# Allegro board ENIGHTER_V11.brd
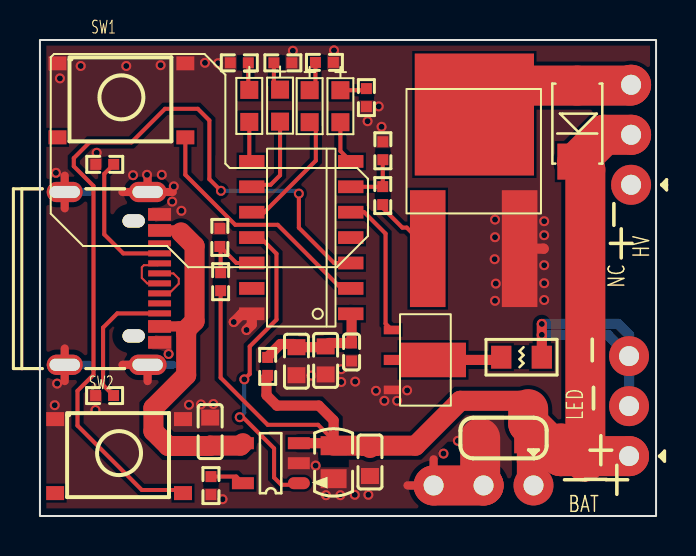
[diagram p0: board, top side]
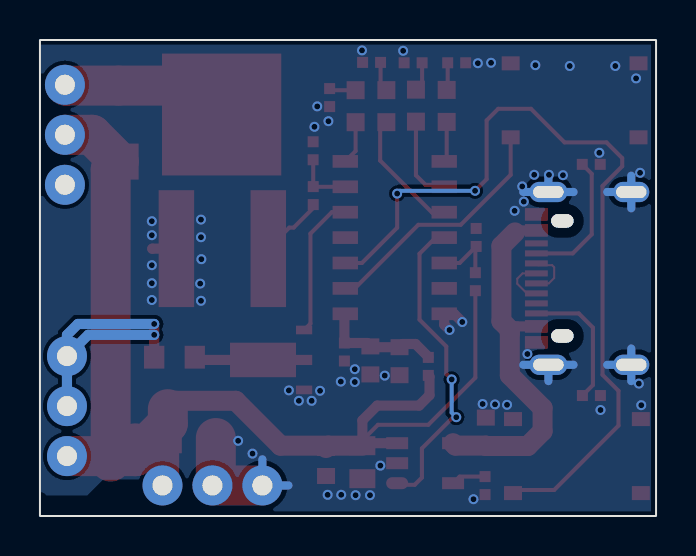
[diagram p1: board, bottom side, seen from below]

Outline 30.84 x 23.8 mm; copper layers: TOP, GND1, POWER1, POWER2, GND2, SIGNAL, GND3, BOTTOM. Coordinates in mm from the lower left corner of the outline.
Outline path: rectangle 0,0 30.84,23.8

## Placement (name value [footprint] x y rotation side)
C2  22uF  [C0805]  14.7 2.69 270 top
C3  4.7uF  [C0603]  14.3 7.78 270 top
C4  0.1uF  [C0402]  15.6 8.2 270 top
C5  4.7uF  [C0603]  12.84 7.74 270 top
C6  4.7uF  [C0603]  16.52 2.7 270 top
C7  4.7uF  [C0603]  8.52 4.22 90 top
C8  47uF  [C1206]  23.21 3.9 180 top
D1  ss34  [DO_214AC]  26.9 19.62 90 top
D2  VLMB1300  [LED0603]  15.04 20.49 270 top
D3  VLMB1300  [LED0603]  10.48 20.5 270 top
D4  VLMB1300  [LED0603]  12.02 20.52 270 top
D5  VLMB1300  [LED0603]  13.5 20.49 270 top
J90047  USB_TYPEC_115H0  [TYPEC-16PIN-GY]  3.31 11.88 270 top
J90048  3pin  [HV_MODEUL]  29.49 2.99 90 top
J90049  3pin  [HV_MODEUL]  24.71 1.53 180 top
L1  -  [HV_MODEUL]  29.59 16.56 90 top
Q7  TMN6010D  [SOT89_2D3]  17.62 6.3 0 top
Q8  TMN6010D  [TO252-3L]  19.41 13.4 0 top
R3  1k  [R0402]  14.24 22.68 0 top
R4  1k  [R0402]  12.16 22.66 0 top
R5  1k  [R0402]  9.98 22.66 180 top
R6  1k  [R0402]  16.34 20.92 270 top
R7  10k  [R0402]  9.04 11.72 90 top
R8  10k  [R0402]  9.01 13.93 90 top
R9  0R  [R0402]  11.4 7.48 90 top
R11  470R  [R0402]  17.16 16.02 270 top
R18  2k  [R0402]  8.56 1.52 270 top
R20  100R  [R0805]  24.11 7.94 0 top
R23  5.1k  [R0402]  3.24 17.58 0 top
R24  5.1k  [R0402]  3.23 6.02 0 top
R25  4.7k  [R0402]  17.16 18.26 90 top
SW1  TACT_SPST  [KEY_4]  0.88 22.63 0 top
SW2  TACT_SPST  [KEY_4]  0.76 4.84 0 top
U1  PMS120-S14A  [SOP14_3D8]  13.08 13.92 180 top
U3  TP4055  [SOT23-5]  11.56 2.64 180 top

## Library data of the parts
C2-C8 = CAP_NP
D1 = DIODE SCHOTTKY_0
D2-D5 = DIODE-LED_0
J90047 = USB31_TYPE_C_0
J90048 J90049 = 3pin
L1 = HV_MODEUL
Q7 Q8 = MOSFET-N-ENHANCE
R3-R9 R11 R18 R20 R23-R25 = RESISTOR
SW1 SW2 = SWITCH_PRESS_4P
U1 = PMS120-S14A: Tolerance: ***; User Part Number: ***
U3 = TP4055

## Footprints (pads in the part's own frame, mm; a bottom-side part is the same pattern mirrored in y, then rotated)
C0402
  rect 0.55x0.55 smd: 1(-0.45,0) 2(0.45,0)
C0603
  rect 0.8x0.9 smd: 1(-0.7,0) 2(0.7,0)
C0805
  rect 0.95x1.3 smd: 1(-0.825,0) 2(0.825,0)
C1206
  rect 1.27x1.524 smd: 1(-1.168,0) 2(1.168,0)
DO_214AC
  rect 1.8x2 smd: 1(1.9,0) 2(-1.9,0)
HV_MODEUL
  round 2 hole 1: 1(0,0) 2(2.5,0) 3(5,0)
KEY_4
  rect 0.9x0.7 smd: 1(0,0) 2(6.4,0) 3(0,-3.7) 4(6.4,-3.7)
LED0603
  rect 0.9x0.9 smd: 1(-0.8,0) 2(0.8,0)
R0402
  rect 0.55x0.55 smd: 1(-0.45,0) 2(0.45,0)
R0805
  rect 1.016x1.143 smd: 1(-1.016,0) 2(1.016,0)
SOP14_3D8
  rect 1.27x0.635 smd: 1(-2.477,3.81) 2(-2.477,2.54) 3(-2.477,1.27) 4(-2.477,0) 5(-2.477,-1.27) 6(-2.477,-2.54) 7(-2.477,-3.81) 8(2.477,-3.81) 9(2.477,-2.54) 10(2.477,-1.27) 11(2.477,0) 12(2.477,1.27) 13(2.477,2.54) 14(2.477,3.81)
SOT23-5
  oval 1.1x0.6 smd: 1(-1.4,1)
  rect 1.1x0.6 smd: 2(-1.4,0) 3(-1.4,-1) 4(1.4,-1) 5(1.4,1)
SOT89_2D3
  rect 0.813x0.432 smd: 1(0,2.997) 2(0,0)
  custom 4.115x1.727 smd: 3(1.651,1.499)
TO252-3L
  rect 1.778x5.842 smd: 1(-0.004,-0.034) 2(4.596,-0.034)
  rect 5.969x6.096 smd: 3(2.332,6.673)
TYPEC-16PIN-GY
  oval 0.66x1.118 hole 0.66x1.118 unplated: (-2.875,1.375) (2.875,1.375)
  rect 0.61x1.143 smd: A1(-3.2,2.675) A4(-2.4,2.675) A9(2.4,2.675) A12(3.2,2.675) B1(3.2,2.675) B4(2.4,2.675) B9(-2.4,2.675) B12(-3.2,2.675)
  rect 0.305x1.143 smd: A5(-1.25,2.675) A6(-0.25,2.675) A7(0.25,2.675) A8(-1.75,2.675) B5(1.75,2.675) B6(0.75,2.675) B7(-0.75,2.675) B8(1.25,2.675)
  oval 1.016x1.803 hole 0.61x1.524: E1(-4.32,-2.075) E2(4.32,-2.075)
  oval 1.016x1.905 hole 0.61x1.524: E3(-4.32,2.075) E4(4.32,2.075)

## Nets
VBAT: R7.2 R8.1 U1.12(PA4/AD9)
VCC3V3: C3.1 C4.1 C5.1 R9.2 U1.1(VDD)
0: C2.2 C3.2 C4.2 C5.2 C6.2 C7.2 C8.2 J90047.A1(GND1) J90047.A12(GND2) J90047.B1(GND3) J90047.B12(GND4) J90047.E1(GND_E1) J90047.E2(GND_E2) J90047.E3(GND_E3) J90047.E4(GND_E4) J90049.2 J90049.3 Q7.2(SOURCE) Q8.2(SOURCE) R3.2 R4.2 R5.2 R6.2 R8.2 R18.2 R23.1 R24.1 R25.2 SW1.1 SW1.2 SW2.1 SW2.2 U1.14(GND) U3.2(GND)
BAT: C2.1 C6.1 C8.1 D1.2(CATHODE) J90048.1 J90049.1 L1.2 R7.1 R9.1 U3.3(BAT)
CHAR_DET: U1.11(PA3/AD8/TM2PWM) U3.1(CHRG)
USB5V: C7.1 J90047.A4(VBUS_1) J90047.A9(VBUS_2) J90047.B4(VBUS_3) J90047.B9(VBUS_4) U3.4(VCC)
N06163: SW1.4 U1.2(PA7/X1)
N06266: SW2.4 U1.3(PA6/X2)
N06579: R11.1 R25.1 U1.6(PB4/AD4/TM2PWM)
N06646: D2.2(A) U1.7(PB5/AD5/TM3PWM)
N06661: D3.2(A) U1.8(PB0/AD0)
N06665: D4.2(A) U1.9(PB1/AD1)
N06669: D5.2(A) U1.10(PB3/AD3)
N06989: D4.1(C) R4.1
N06991: D2.1(C) R6.1
N06993: D5.1(C) R3.1
N06995: D3.1(C) R5.1
N08138: Q8.1(GATE) R11.2
N08948: D1.1(ANODE) L1.3 Q8.3(DRAIN)
N10025: J90047.A5(CC1) R23.2
N10061: J90047.B5(CC2) R24.2
N10189: J90047.A7(DM1) J90047.B7(DM2)
N10201: J90047.A6(DP1) J90047.B6(DP2)
N11024: R18.1 U3.5(PROG)
N13531: Q7.1(GATE) U1.5(PB7/AD7/TM3PWM)
N13634: Q7.3(DRAIN) R20.1
N13687: J90048.2 J90048.3 R20.2

Pads without a net: J90047 A8 B8; L1 1; SW1 3; SW2 3; U1 4 13

## Via types
v1: diameter 0.5, hole 0.3, TOP to BOTTOM, 60 vias

## Routing (per net, layer and track width the routed paths; a pad name or vN(x,y) marks a point on that pad's centre or on a via; arc(x,y) is an arc through that point)
VBAT: length 3.2
  TOP w0.203: 9.04,13.44 R8.1 ; 9.04,13.44 9.83,12.65 U1.12 ; 9.04,13.44 R7.2
VCC3V3: length 6.1
  TOP w0.508: U1.1 15.6,10.07 C4.1 14.47,8.65 C3.1 14.26,8.44 C5.1 12.68,8.6 12.04,8.6 11.4,7.96 R9.2
0: length 34.3
  TOP w0.406: 18.4,1.53 J90049.3 19.71,2.83 ; 1.24,15.39 J90047.E1 1.24,17.01 ; 5.39,6.75 J90047.E4 4.13,7.56 ; J90047.E3 6.65,16.2 ; J90047.E3 5.39,17.01 ; J90047.E3 4.13,16.2 ; 1.24,8.37 J90047.E2 1.24,6.75
  TOP w0.508: Q8.2 25.21,13.37 25.22,13.36 ; v1(9.7,9.7) 10.11,10.11 U1.14 10.6,9.56 v1(10.34,9.3)
  TOP w2: C8.2 22.04,1.7 J90049.2 J90049.3
  BOTTOM w0.406: 4.13,16.2 J90047.E3 ; J90047.E3 6.65,16.2 ; J90047.E3 5.39,17.01 ; 19.71,2.83 J90049.3 18.4,1.53 ; 1.24,15.39 J90047.E1 ; J90047.E1 1.24,17.01 ; J90047.E1 2.45,16.2 ; J90047.E4 6.65,7.56 ; J90047.E4 4.13,7.56 ; J90047.E4 5.39,6.75 ; J90047.E2 1.24,8.37 ; J90047.E2 1.24,6.75 ; J90047.E2 2.45,7.56
  vias: v1(0.8,17.16) v1(0.74,5.54) v1(0.86,6.62) v1(1,21.88) v1(2.04,22.5) v1(2.78,5.3) v1(2.84,18.16) v1(4.32,22.5) v1(4.66,17.04) v1(5.36,17.06) v1(6.04,22.54) v1(6.1,17.06) v1(6.44,8.1) v1(6.7,16.48) v1(6.62,15.72) v1(7.08,15.26) v1(7.46,5.56) v1(8.06,5.58) v1(8.26,22.66) v1(8.68,5.6) v1(8.92,22.64) v1(9.14,0.84) v1(12.66,23.26) v1(13.58,7.02) v1(13.8,2.52) v1(14.32,1.04) v1(14.72,23.28) v1(15.08,7.34) v1(15.08,6.7) v1(15.04,1.04) v1(15.78,6.72) v1(15.76,1.06) v1(16.4,19.74) v1(16.44,1.06) v1(16.82,6.26) v1(16.96,20.48) v1(17.1,19.46) v1(17.24,5.76) v1(17.88,5.76) v1(18.38,6.28) v1(20.2,3.12) v1(20.92,3.76) v1(22.78,14.82) v1(22.78,13.94) v1(22.76,12.84) v1(22.78,10.76) v1(22.82,11.62) v1(25.24,14.74) v1(25.24,14.04) v1(25.24,12.54) v1(25.24,11.64) v1(25.24,10.8)
BAT: length 64.2
  TOP w0.203: R7.1 9.04,6.92 11.4,4.56 13.92,4.56 14.7,3.78
  TOP w0.508: R9.1 11.34,6.97 11.34,6.04 11.86,5.52 13.96,5.52 14.7,4.78 C2.1 14.58,3.64 U3.3
  TOP w1: 24.44,4.62 24.44,3.96 C8.1 24.37,2.72 ; J90049.1 24.37,1.86 24.37,2.72 ; 24.37,2.72 29.21,2.72 J90048.1 ; 16.4,3.52 18.8,3.52 21.04,5.76 24.02,5.76 24.44,5.34 ; 16.4,3.52 C6.1 ; 16.4,3.52 C2.1
  TOP w2: 26.07,3.63 26.07,2.99 ; 26.07,2.99 24.44,4.62 24.44,5.34 ; 26.07,2.99 J90048.1 ; 27.3,2.72 27.3,17.32 D1.2 28.24,19.06 L1.2
CHAR_DET: length 15.8
  TOP w0.203: U3.1 12.88,1.56 12.08,1.56 11.72,1.92 11.72,3.38 10.16,4.94 v1(10,4.94) ; v1(10.23,6.83) 10.5,7.1 10.5,8.48 11.84,9.82 11.84,13.12 11.04,13.92 U1.11
  BOTTOM w0.203: v1(10.23,6.83) 10.23,5.17 v1(10,4.94)
USB5V: length 18.5
  TOP w0.508: J90047.A9 6.96,9.48 7.32,9.12 ; 7.06,14.18 6.96,14.28 J90047.A4
  TOP w1: U3.4 10.04,3.52 C7.1 8.5,3.5 6.42,3.5 5.68,4.24 5.68,5.4 7.32,7.04 7.32,9.32 7.74,9.74 7.74,13.5 7.06,14.18
N06163: length 12.5
  TOP w0.203: 7.28,18.93 7.28,17.06 9.78,14.56 11.9,14.56 15.08,11.38 U1.2
N06266: length 41.6
  TOP w0.203: U1.3 14.72,12.65 12.96,14.41 v1(12.96,16.12) ; SW2.4 7,1.3 5.1,1.3 1.88,4.52 1.88,6.26 2.68,7.06 2.68,16.5 1.69,17.49 1.69,17.89 2.48,18.68 4.58,18.68 6.26,20.36 7.9,20.36 8.48,19.78 8.48,16.84 v1(9.06,16.26)
  BOTTOM w0.203: v1(9.06,16.26) 12.82,16.26 v1(12.96,16.12)
N06579: length 3
  TOP w0.203: R25.1 17.16,17.81 R11.1 17.15,16.46 U1.6
N06646: length 2.2
  TOP w0.203: D2.2 15.04,18.25 U1.7
N06661: length 2
  TOP w0.203: D3.2 10.48,17.85 U1.8
N06665: length 4.3
  TOP w0.203: U1.9 10.7,16.56 11.54,16.56 12.02,17.04 D4.2
N06669: length 6.3
  TOP w0.203: U1.10 10.63,15.16 11.2,15.16 13.81,17.77 13.81,19.38 D5.2
N06989: length 1.5
  TOP w0.203: D4.1 11.71,21.63 R4.1
N06991: length 1.3
  TOP w0.203: D2.1 16.26,21.29 R6.1
N06993: length 1.5
  TOP w0.203: D5.1 13.79,21.58 R3.1
N06995: length 1.4
  TOP w0.203: D3.1 10.43,21.35 R5.1
N08138: length 3.3
  TOP w0.203: R11.2 17.16,15.4 18.14,14.42 18.36,14.42 Q8.1
N08948: length 8.5
  TOP w2: L1.3 29.55,21.52 D1.1 23.19,21.52 Q8.3
N10025: length 6.9
  TOP w0.203: R23.2 3.22,17.11 3.22,14.08 4.17,13.13 J90047.A5
N10061: length 6.7
  TOP w0.203: J90047.B5 3.87,10.13 3.16,9.42 3.16,6.55 R24.2
N10189: length 2.5
  TOP w0.102: J90047.B7 5.9,12.54 5.2,12.54 5.1,12.44 5.1,11.9 5.37,11.63 J90047.A7
N10201: length 2.7
  TOP w0.102: J90047.A6 6.68,12.13 6.95,11.86 6.95,11.61 6.4,11.06 6.06,11.06 5.92,11.2 J90047.B6
N11024: length 1.7
  TOP w0.203: U3.5 9.83,1.97 R18.1
N13531: length 7.1
  TOP w0.203: Q7.1 17.3,9.62 17.3,14.12 16.23,15.19 U1.5
N13634: length 3.9
  TOP w0.508: R20.1 22.95,7.8 Q7.3
N13687: length 14.6
  TOP w0.508: v1(25.12,9.6) v1(25.12,9.06) R20.2
  BOTTOM w0.508: v1(25.12,9.6) 28.94,9.6 29.49,9.05 J90048.3 ; J90048.3 28.42,9.06 v1(25.12,9.06) ; J90048.3 J90048.2

## Copper pours and planes (outline as drawn; the poured copper is in the pictures)
0 on TOP: 8.58,18.04 9.38,18.04 9.46,17.96 9.46,17.24 9.14,16.92 9.14,16.78 9.08,16.72 8.76,16.72 8.58,16.9 8.58,17.96 8.62,18
0 on TOP: 30.54,23.52 30.54,0.38 0.32,0.38 0.32,23.52 ; 11 cut-outs
0 on TOP: 14.46,13.84 15.34,13.84 15.52,13.66 15.52,12.8 15.08,12.36 14.16,12.36 13.92,12.6 13.92,12.92 14.16,13.16 14.4,13.16 14.42,13.18 14.42,13.8
0 on BOTTOM: 0.25,0.23 0.25,23.57 30.78,23.57 30.82,23.53 30.82,0.27 30.78,0.23 ; 5 cut-outs
BAT on TOP: 20.72,0.44 20.2,0.96 20.2,3.14 20.52,3.46 22.3,3.46 22.3,0.58 22.16,0.44 ; 2 cut-outs
BAT on TOP: 23.88,4.36 23.88,2.22 26.36,2.22 26.36,4.36

## Text on the board
Ref Des/Silkscreen Top: BAT | LED | NC | HV | - | +
USER_PART_NUM_TOP: FIGURE | SIZE | 0.3 | 1.0 | 1.524x0.6096 | 1.1176x0.6604 | DRILL CHART: TOP to BOTTOM | ALL UNITS ARE IN MILLIMETERS | PLATED | NON-PLATED | QTY | 89 | 6 | 4 | 2
